# EAGLE board daisy-remote-display (EAGLE 7.6.0)

Size 76.33 x 25.4 mm. Coordinates in mm from the lower left corner, seen from the top.
Outline: 0,0 0,25.4 76.33,25.4 76.33,0 0,0
Copper layers (1*16): Top 0.0356mm / dielectric 1.5011mm / Bottom 0.0356mm
Design rules "LaenPCBOrder": minimum track width 6mil, minimum drill 13mil, track to track 6mil, track to pad 6mil, pad to pad 6mil, via to via 6mil, smd to smd 6mil, copper to edge 15mil, drill to drill 6mil, minimum pad ring 7mil, minimum via ring 7mil, stop-mask expansion 3mil, vias tented up to drill 0mil, thermal gap 10mil
Net classes: 1 power: width 0.381 mm, clearance 0.254 mm
Holes 3.2 mm at 26.67,22.86 26.67,2.54 62.74,22.86 62.48,2.54

## Footprints (pad centres in the part's own frame; a part is rotated, then mirrored left to right if it is on the bottom)
1X08_ROUND = drill 1.016 pad 1.88: 1 0,0; 2 2.54,0; 3 5.08,0; 4 7.62,0; 5 10.16,0; 6 12.7,0; 7 15.24,0; 8 17.78,0
1X02 = drill 1.016 pad 1.88: 1 0,0; 2 2.54,0
1X06 = drill 1.016 pad 1.88: 1 0,0; 2 2.54,0; 3 5.08,0; 4 7.62,0; 5 10.16,0; 6 12.7,0
0204/7 = drill 0.813 octagon: 1 -3.81,0; 2 3.81,0
TACTILE-PTH = drill 1.016 pad 1.88: 1 -3.251,2.261; 2 3.251,2.261; 3 -3.251,-2.261; 4 3.251,-2.261
RJ45-8 = drill 1 square: 1 -4.445,6.35 | drill 1: 2 -3.175,8.89; 3 -1.905,6.35; 4 -0.635,8.89; 5 0.635,6.35; 6 1.905,8.89; 7 3.175,6.35; 8 4.445,8.89 | hole 3.2: -5.715,0; 5.715,0
JSTPH2 = smd 1 x 4.6: 1 -1,-3.7; 2 1,-3.7 | smd 1.6 x 3.4: NC1 -3.4,1.5; NC2 3.4,1.5

## Placement (x,y rotation side)
J1  [1X08_ROUND]  17.91,4.45 90 top
J3  [1X02]  2.67,5.71 270 top
J4  [1X06]  36.58,2.29 0 top
R4  10k  [0204/7]  22.86,8.64 270 top
R5  10k  [0204/7]  22.86,18.29 270 top
S1  [TACTILE-PTH]  71.5,21.21 0 top
S2  [TACTILE-PTH]  71.37,9.78 0 top
U1  RJ45  [RJ45-8]  4.7,17.27 270 top
X3  JSTPH  [JSTPH2]  8.89,4.7 90 top

## Library data of the parts
J1 J4 = SparkFun-Connectors; PROD_ID: CONN-08437
J3 = SparkFun-Connectors
R4 R5 = resistor
S1 S2 = SparkFun-Retired
U1 = SparkFun
X3 = microbuilder

## Nets
A4_SDA: J1.8 J4.1 U1.1
A5_SCL: J1.7 J4.2 U1.2
ET4: J1.5 R4.2 S1.1 S1.2 U1.4
ET5: J1.4 R5.2 S2.1 S2.2 U1.5
GND [power]: J1.1 J3.2 J4.4 R4.1 R5.1 U1.8 X3.1
RST: J1.6 J4.3 U1.3
VCC: J1.2 J4.5 S1.3 S1.4 S2.3 S2.4 U1.7
VIN [power]: J1.3 J3.1 U1.6 X3.2

## Tracks (layer width: path | path; a pad name or v marks a point on that pad's centre or on a via)
A4_SDA  (2 unrouted)
A5_SCL  (2 unrouted)
ET4  (4 unrouted)
ET5  (4 unrouted)
GND  (6 unrouted)
RST  (2 unrouted)
VCC  (6 unrouted)
VIN  (3 unrouted)

## Text on the board
tPlace: ver 0.1.0 | daisy | remote-display
bPlace: pvos.org/daisy
tNames: E8 | E7 | E6 | E5 | E4 | E3 | SDA | SCL | RST | GND | VCC | NC | E2 | + | E1 | E2 | E3 | E8 | E7 | NC | E1 | -